# Altium PCB PCB2.PcbDoc
Units mm, origin at the board's own origin, x right, y up, seen from the top; angles counter-clockwise.
Board outline 64.26 x 51.94 mm, 2 copper layers (Top Layer, Bottom Layer); 39 components, 26 nets, 146 pads, 53 vias.
Unrouted connection lines stored in the file: 56.
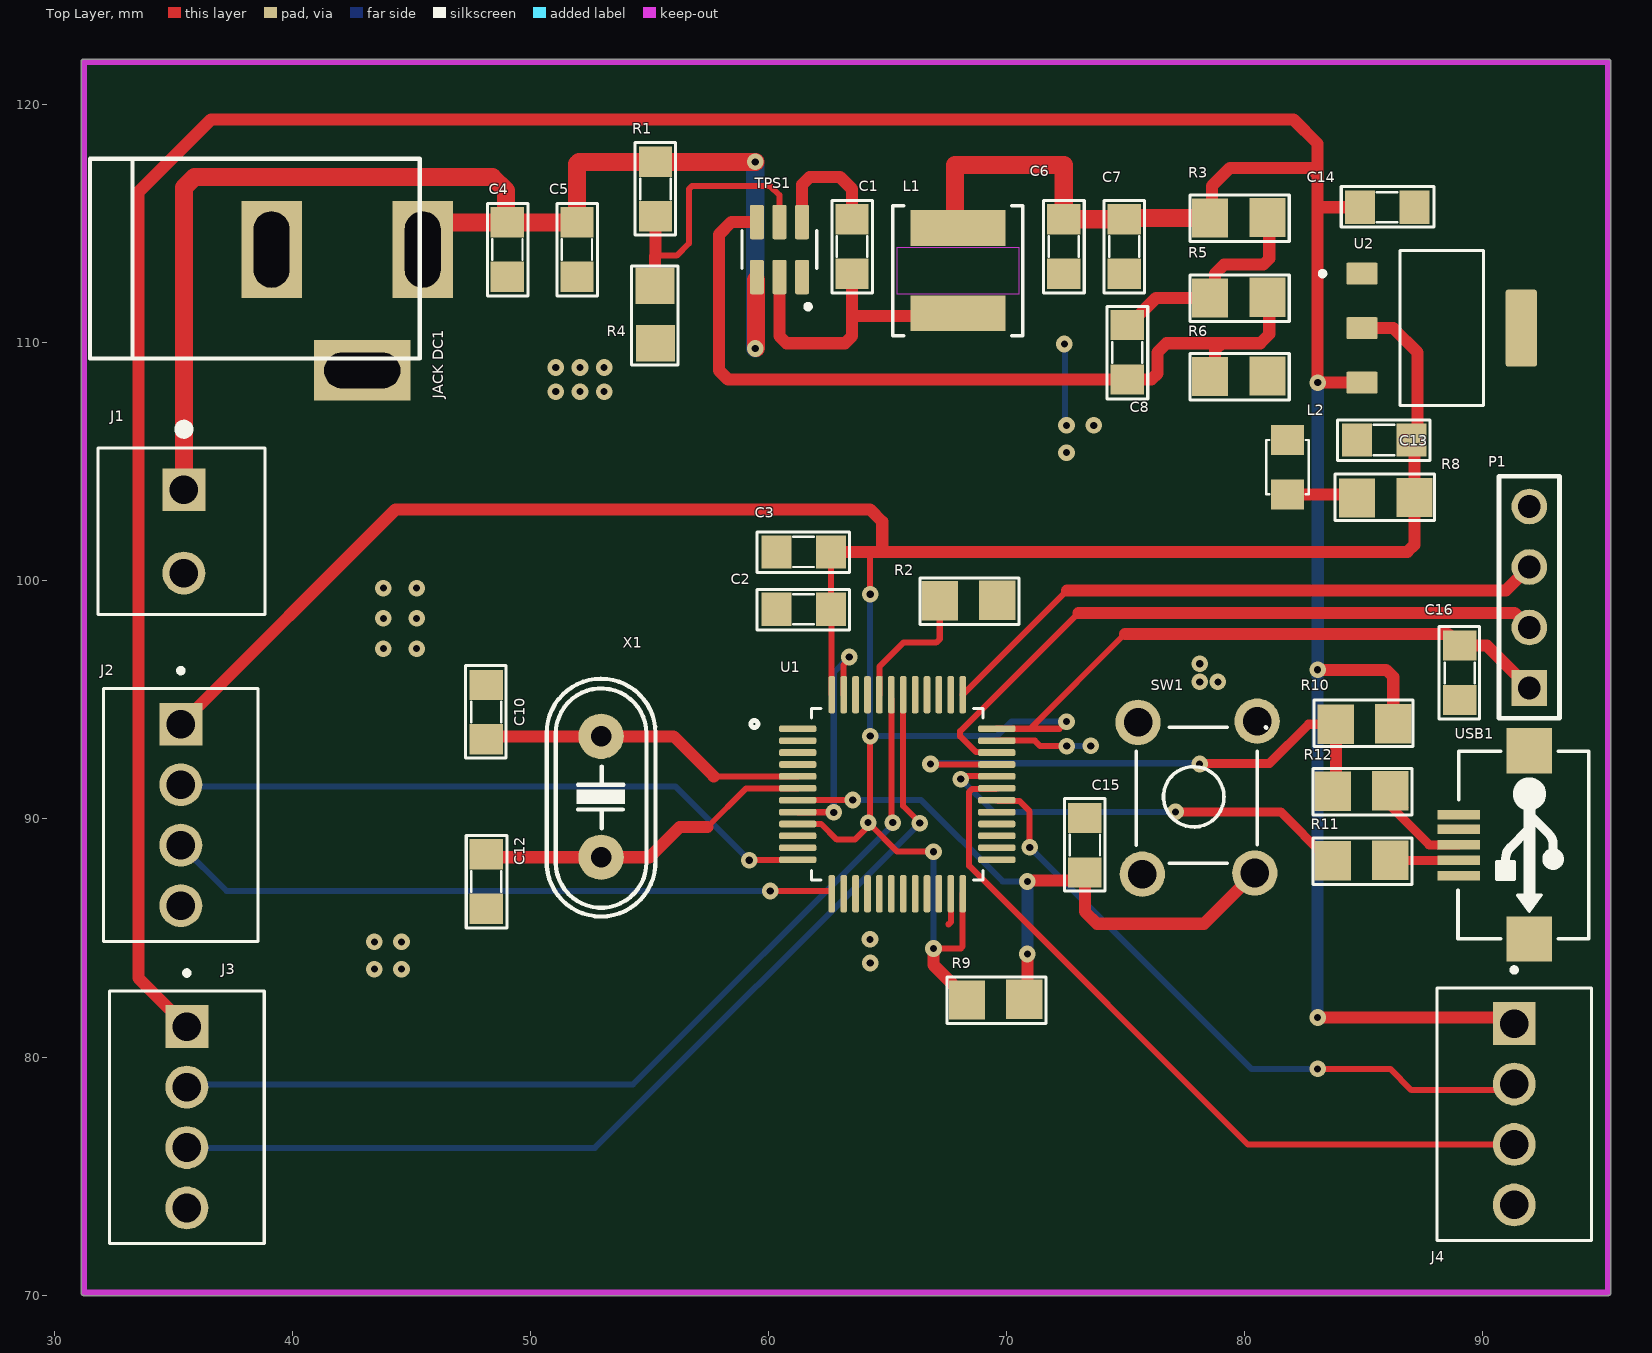
[diagram p0: Top Layer view]
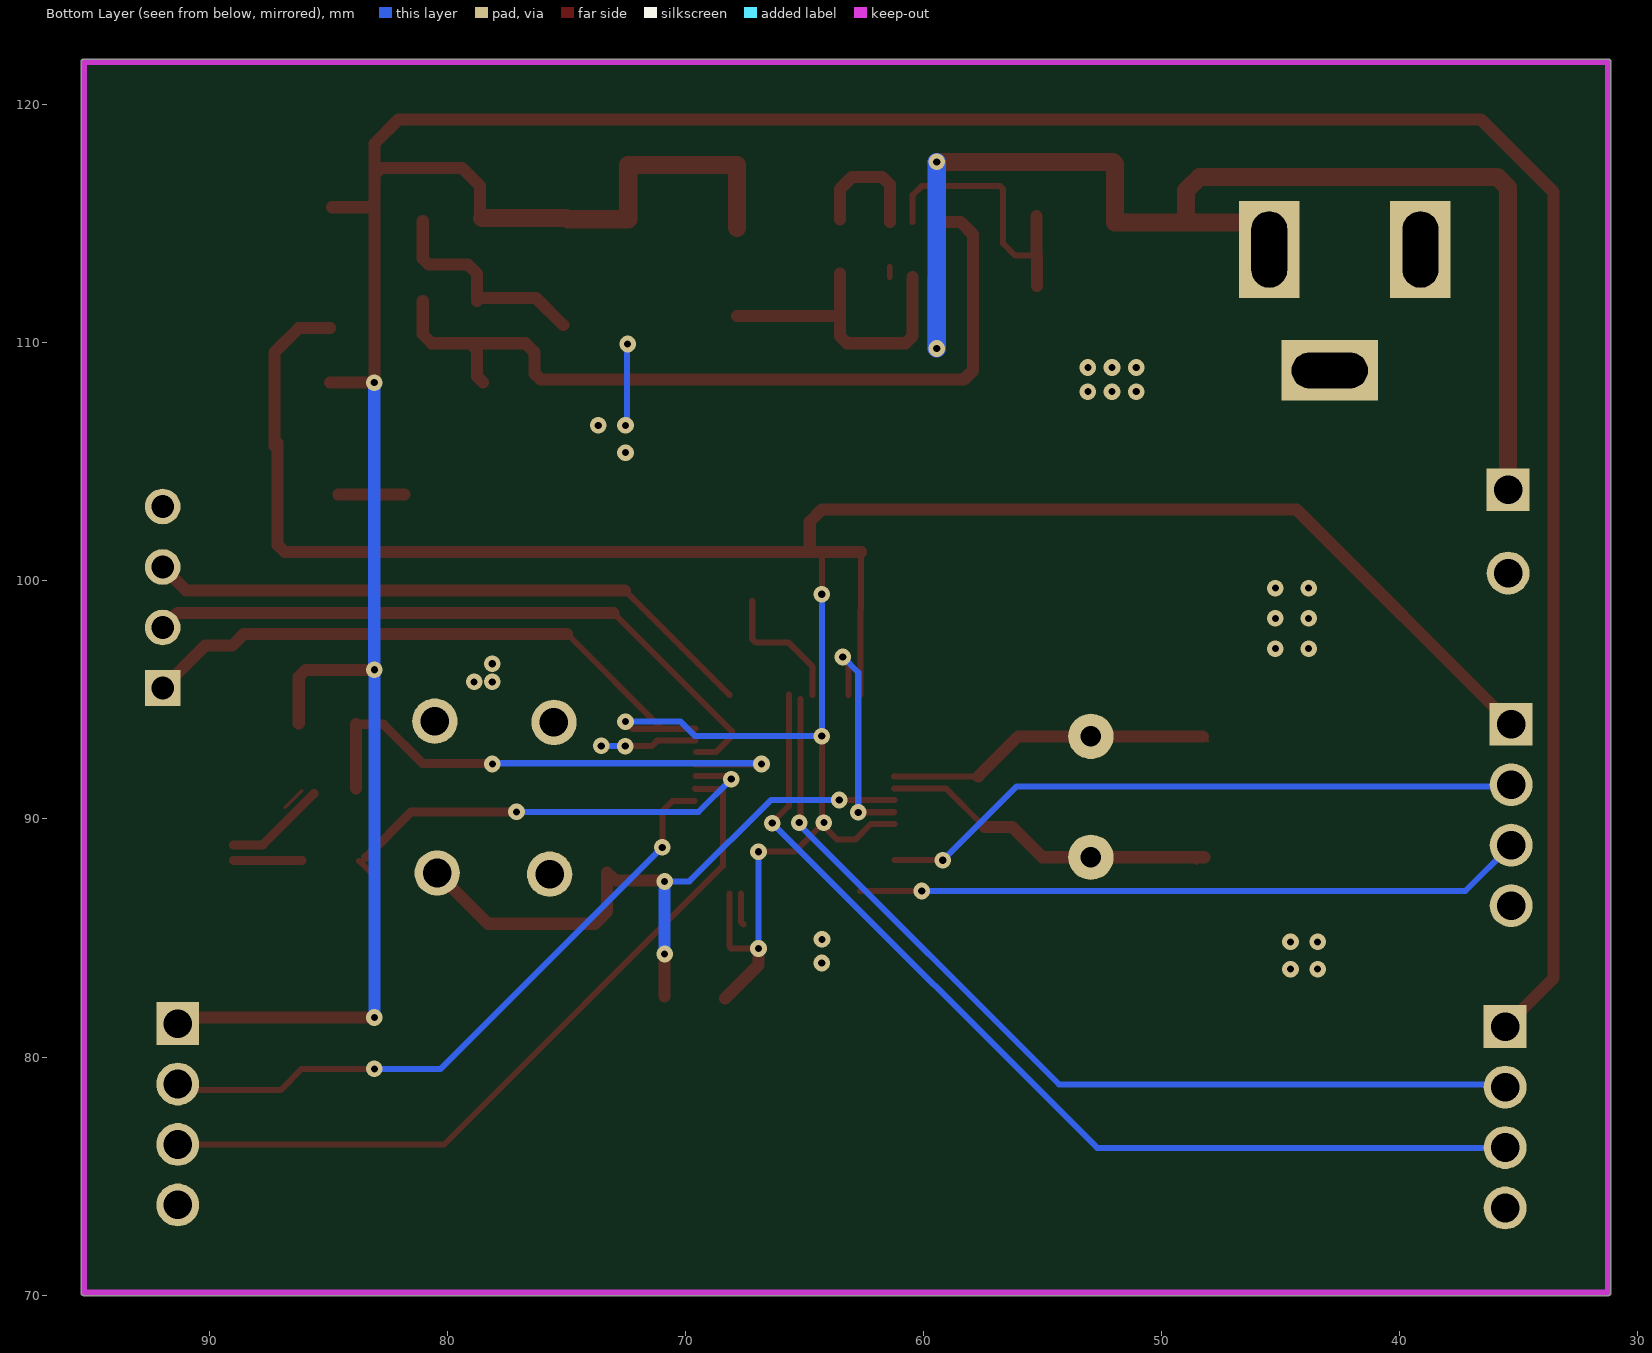
[diagram p1: Bottom Layer view, seen from below]
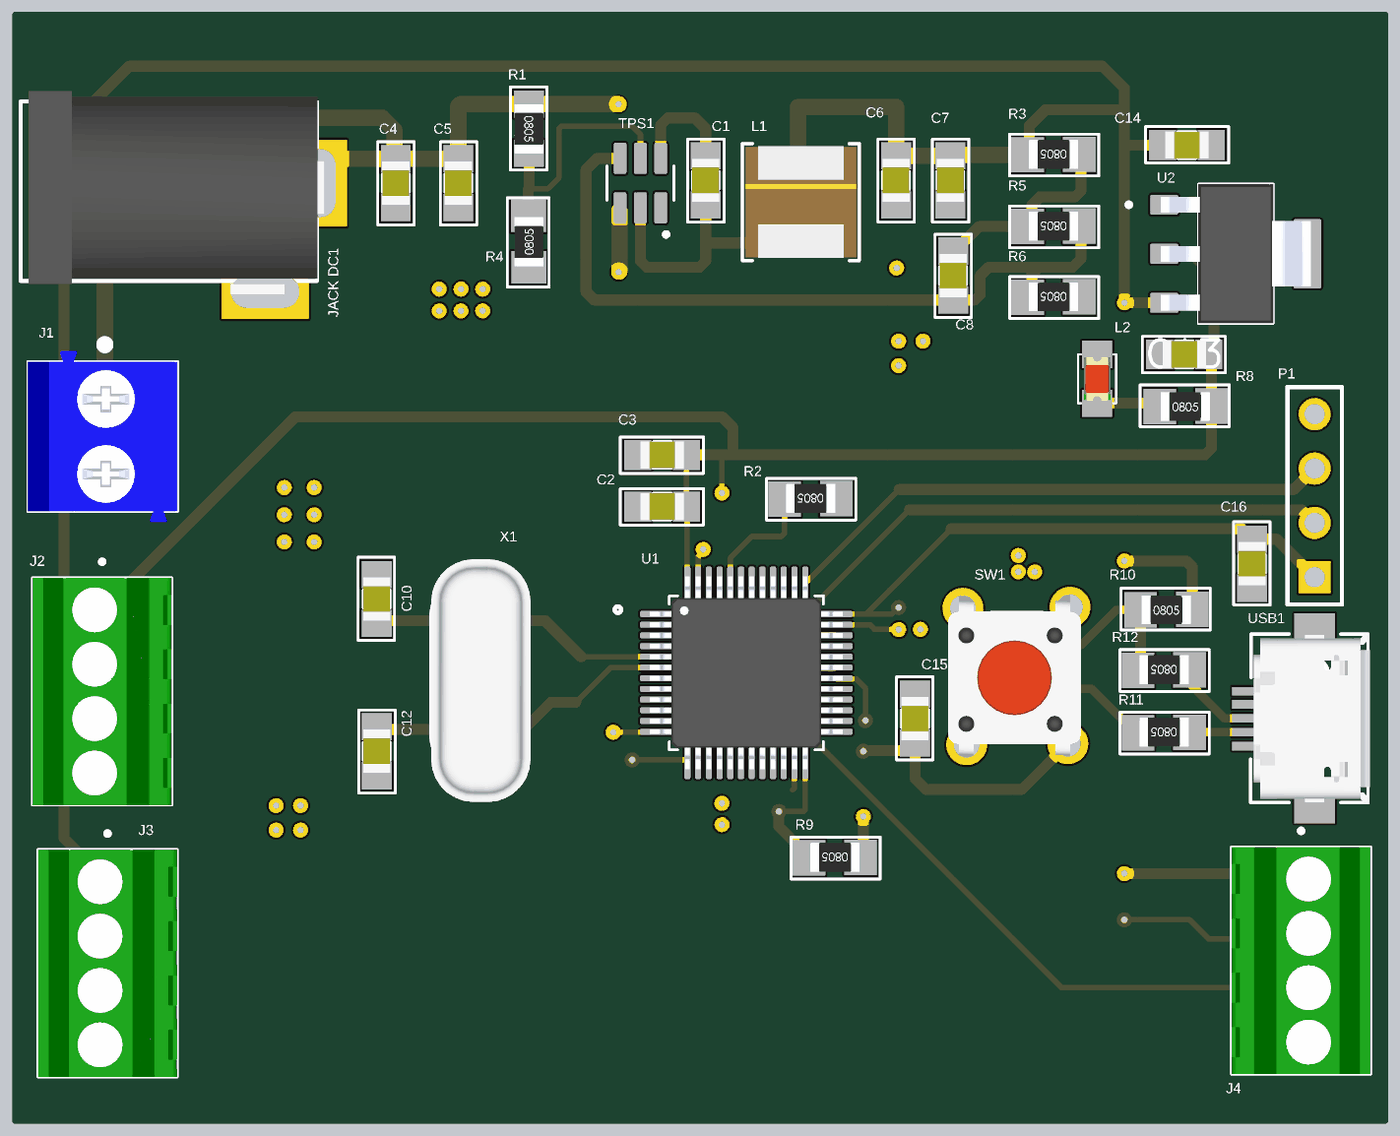
[diagram p2: 3D render of the assembled board from above, using the file's embedded part models]

## Layer stack, top to bottom
Top Solder: solder mask 0.0102, Solder Resist, Dk 3.5
Top Layer: signal copper 0.0356
Dielectric 1: dielectric 0.32, FR-4, Dk 4.8
Bottom Layer: signal copper 0.0356
Bottom Solder: solder mask 0.0102, Solder Resist, Dk 3.5

## Board outline
31.115,70.104 31.115,121.793 cw(c31.242,121.793) 31.242,121.92 95.25,121.92 cw(c95.25,121.793) 95.377,121.793 95.377,70.104 cw(c95.25,70.104) 95.25,69.977 31.242,69.977 cw(c31.242,70.104)

## Design rules (kind name [scope] priority, off if disabled: settings)
Clearance [All] p1: gap=0.254 ignorepadtopadclearanceinfootprint=FALSE
PolygonConnect [All] p1: connectstyle=Relief reliefconductorwidth=0.254 reliefentries=4 polygonreliefangle="90 Angle" airgapwidth=0.254
RoomDefinition Sheet2 [InComponentClass('Sheet2')] p1: confinementstyle=ConfineIn formatcopy=TRUE lockcomponents=FALSE outline 178.435,21.082 475.996,21.082 475.996,62.23 178.435,62.23
RoutingVias [All] p1: holewidth=0.254 width=0.635 viastyle="Through Hole" minholewidth=0.254 minwidth=0.635 maxholewidth=0.254 maxwidth=0.635
SMDNeckDown [All] p1: percent=40.000
SolderMaskExpansion [All] p1: expansion=0.102 istentingtop=FALSE
Width [All] p1: maxlimit=0.127 minlimit=0.127 preferedwidth=0.127
30 further rules are at their usual default settings.

## Components (designator, comment, footprint, x,y, rotation, side; value= is the part's Value field where it differs from the comment)
C1 "0.1uF" SM-0805 63.5,114.046 r90 top value=103
C2 "104" SM-0805 61.468,98.806 r0 top value=103
C3 "10pF" SM-0805 61.468,101.219 r0 top value=103
C4 "10uF" SM-0805 49.022,113.919 r90 top value=103
C5 "0.1uF" SM-0805 51.943,113.919 r90 top value=103
C6 "22uF" SM-0805 72.39,114.046 r90 top value=103
C7 "22uF" SM-0805 74.93,114.046 r90 top value=103
C8 "100pF" SM-0805 75.057,109.601 r90 top value=103
C10 "20pF" SM-0805 48.133,94.488 r270 top value=103
C12 "20pF" SM-0805 48.133,87.376 r90 top value=103
C13 "10uF" SM-0805 85.852,105.918 r0 top value=103
C14 "10uF" SM-0805 85.979,115.697 r180 top value=103
C15 "105" SM-0805 73.279,88.9 r270 top value=103
C16 "104" SM-0805 89.027,96.139 r270 top value=103
J1 "1776275-2" TE_1776275-2 35.433,103.83 r270 top
J2 "282834-4" TE_282834-4 35.306,90.17 r270 top
J3 "282834-4" TE_282834-4 35.56,77.47 r270 top
J4 "282834-4" TE_282834-4 91.313,77.597 r270 top
"JACK DC1" "JACK DC 5.5" "JACK DC 5.5" 42.291,111.379 r0 top value="Jac DC"
L1 "SRN5040-3R3M" IND_SRN5040_BRN 67.945,113.03 r270 top
L2 "LED 0805" LED-0805-Red 81.788,103.632 r90 top
P1 "Header 4" HDR1X4 91.948,95.504 r90 top
R1 "510K" SM-0805 55.245,116.459 r270 top value=1K
R2 "1M" "0805 res" 70.942,100.178 r180 top value=1K
R3 "49.9k" "0805 res" 82.296,116.256 r180 top value="R1/4W - 1K"
R4 "105k" "0805 res" 56.236,108.636 r90 top value="R1/4W - 1K"
R5 "100k" "0805 res" 82.296,112.903 r180 top value="R1/4W - 1K"
R6 "20k" "0805 res" 82.296,109.601 r180 top value="R1/4W - 1K"
R8 "330" "0805 res" 83.363,102.489 r0 top value=1K
R9 "10K" "0805 res" 72.085,83.414 r180 top value=1K
R10 "4.7k" "0805 res" 82.474,92.989 r0 top value=1K
R11 "20" "0805 res" 87.452,89.256 r180 top value=1K
R12 "20" "0805 res" 87.452,92.177 r180 top value=1K
SW1 "SW" SW4 75.438,87.757 r90 top value="Button chip 4 pin"
TPS1 "TPS54202DDCR" SOT95P280X110-6N 60.452,113.919 r90 top
U1 "STM32F103C8T6" QFP50P900X900X160-48N 65.398,91.039 r0 top
U2 "AMS1117-3.3" SOT229P700X180-4N 88.265,110.617 r0 top
USB1 "USB Micro 5p SMD" "USB Micro 5p SMD" 88.98,88.913 r270 top
X1 "8Mhz" XT2 52.959,90.932 r90 top value=4Mhz

## Footprints (in the part's own frame and the unit in brackets; to place one, negate y for a bottom-side part, rotate by r counter-clockwise, add the part's x,y. Pads: shape width x height; smd on the part's side, far side on the other; paste and mask are expansions set on the pad)
"0805 res" [mil]
  rect 60x65 smd: 1(53,39) 2(148,40)
  silkscreen extent 17,2 181,79, body extent 55,12 145,66, height 30
HDR1X4 [mm] "Connector; Header; 4 Position"
  rect 1.5x1.5 hole 0.95: 1(0,0)
  round 1.5 hole 0.95: 2(2.54,0) 3(5.08,0) 4(7.62,0)
  silkscreen extent -1.27,-1.27 8.89,1.27
IND_SRN5040_BRN [mil]
  rect 59x157 smd paste+0 mask+0: 1(-70.5,0) 2(70.5,0)
  Top Layer keep-out region: -39,-100.5 -39,100.5 39,100.5 39,-100.5
  silkscreen extent -108,-108 108,108, body extent -103,-103 103,103, height 157
"JACK DC 5.5" [mm] "Jac DC input"
  rect 2.54x4.064 hole 1.5 slot 3.2 at 90 deg: 1(3.175,2.54) 2(-3.175,2.54)
  rect 4.064x2.54 hole 1.5 slot 3.2 at 0 deg: 3(0.635,-2.54)
  silkscreen extent -10.79,-2.03 3.05,6.35, body extent -10.42,-2.67 3.4,6.84, height 11.02
LED-0805-Red [mil]
  rect 50x55 smd: 1(0,0) 2(90,0)
  silkscreen extent 0,-35 90,35, body extent 5,-25 85,25, height 43
QFP50P900X900X160-48N [mm]
  rrect50% 1.56x0.28 smd: 1(-4.18,2.75) 2(-4.18,2.25) 3(-4.18,1.75) 4(-4.18,1.25) 5(-4.18,0.75) 6(-4.18,0.25) 7(-4.18,-0.25) 8(-4.18,-0.75) 9(-4.18,-1.25) 10(-4.18,-1.75) 11(-4.18,-2.25) 12(-4.18,-2.75) 25(4.18,-2.75) 26(4.18,-2.25) 27(4.18,-1.75) 28(4.18,-1.25) 29(4.18,-0.75) 30(4.18,-0.25) 31(4.18,0.25) 32(4.18,0.75) 33(4.18,1.25) 34(4.18,1.75) 35(4.18,2.25) 36(4.18,2.75)
  rrect50% 0.28x1.56 smd: 13(-2.75,-4.18) 14(-2.25,-4.18) 15(-1.75,-4.18) 16(-1.25,-4.18) 17(-0.75,-4.18) 18(-0.25,-4.18) 19(0.25,-4.18) 20(0.75,-4.18) 21(1.25,-4.18) 22(1.75,-4.18) 23(2.25,-4.18) 24(2.75,-4.18) 37(2.75,4.18) 38(2.25,4.18) 39(1.75,4.18) 40(1.25,4.18) 41(0.75,4.18) 42(0.25,4.18) 43(-0.25,4.18) 44(-0.75,4.18) 45(-1.25,4.18) 46(-1.75,4.18) 47(-2.25,4.18) 48(-2.75,4.18)
  silkscreen extent -6.15,-3.6 3.6,3.6, body extent -4.5,-4.5 4.5,4.5, height 1.6
SM-0805 [mil] "Compoment SMD 80x50mil"
  rect 50x55 smd: 1(-45,0) 2(45,0)
  silkscreen extent -77,-34 76,33, body extent -40,-25 40,25, height 24
SOT95P280X110-6N [mm]
  rrect25% 1.45x0.59 smd: 1(-1.155,-0.95) 2(-1.155,0) 3(-1.155,0.95) 4(1.155,0.95) 5(1.155,0) 6(1.155,-0.95)
  silkscreen extent -2.5,-1.56 0.8,1.56
SOT229P700X180-4N [mm]
  rrect15% 1.31x0.93 smd: 1(-3.345,2.29) 2(-3.345,0) 3(-3.345,-2.29)
  rrect15% 1.31x3.24 smd: 4(3.345,0)
  silkscreen extent -5.1,-3.25 1.75,3.25, body extent -3.5,-3.25 3.5,3.25, height 1.8
SW4 [mil] "SW button 4pin, 250 x250 mil"
  round 75 hole 47.24: 1(-3,-10) 2(250,-200) 3(248,-3) 4(-1,-196)
  silkscreen extent 15,-215 240,0, body extent -36,-220 276,24, height 276
TE_282834-4 [mm]
  rect 1.8x1.8 / inner round 1.8 / far side rect 1.8x1.8 hole 1.2: 1(-3.81,0)
  round 1.8 hole 1.2: 2(-1.27,0) 3(1.27,0) 4(3.81,0)
  silkscreen extent -6.16,-3.25 5.31,3.25, body extent -5.31,-3.25 5.31,3.25, height 10
TE_1776275-2 [mm]
  rect 1.8x1.8 / inner round 1.8 / far side rect 1.8x1.8 hole 1.2: 1(0,0)
  round 1.8 hole 1.2: 2(3.5,0)
  silkscreen extent -2.74,-3.6 5.25,3.4, body extent -2.25,-3.6 5.75,3.4, height 8.3
"USB Micro 5p SMD" [mm]
  rect 0.4x1.778 smd: 1(1.3,0) 2(0.65,0) 3(0,0) 4(-0.65,0) 5(-1.27,0)
  rect 1.9x1.9 smd: 5(-3.95,2.968) 5(3.95,2.968)
  silkscreen extent -3.94,-0.03 3.94,5.46, body extent -3.98,0.11 4,5.54, height 2.71
XT2 [mil] "Footpin for Crystal 2 pin"
  round 75 hole 34: 1(-100,0) 2(100,0)
  silkscreen extent -198,-90 195,90, body extent -233,-93 213,90, height 138

## Part data
C1 C2 C3 C4 C5 C6 C7 C8 C10 C12 C13 C14 C15 C16: library part CM, "Cap SMD"
J1: "2 Position Wire to Board Terminal Block Horizontal with Board 0.138\" (3.50mm) Through Hole", Package=None, Availability=Unavailable, Check_prices=https://www.snapeda.com/parts/1776275-2/TE+Connectivity+AMP+Connectors/view-part/?ref=eda, MF="TE Connectivity", MP=1776275-2, Price=None, SnapEDA_Link=https://www.snapeda.com/parts/1776275-2/TE+Connectivity+AMP+Connectors/view-part/?ref=snap
J2 J3 J4: "4 Position Wire to Board Terminal Block Horizontal with Board 0.100 (2.54mm) Through Hole", Package=None, Availability="In Stock", Check_prices=https://www.snapeda.com/parts/282834-4/TE+Connectivity+AMP+Connectors/view-part/?ref=eda, EU_RoHS_Compliance="Compliant with Exemptions", MF="TE Connectivity", MP=282834-4, Price=None, Purchase-URL=https://pricing.snapeda.com/search/part/282834-4/?ref=eda, SnapEDA_Link=https://www.snapeda.com/parts/282834-4/TE+Connectivity+AMP+Connectors/view-part/?ref=snap
L1: "No Description Available", Mfr_Name="Bourns Electronics", Digi-Key_Part_Number_1=SRN5040-3R3MTR-ND, Digi-Key_Part_Number_2=SRN5040-3R3MCT-ND, Digi-Key_Part_Number_3=SRN5040-3R3MDKR-ND
L2: library part "LED 0805 Do", "Dán", Chung_Loai=Dán, Don_Vi=Con, Ma_Hang=MH000897, Ten_Linh_Kien="LED 0805 Màu Đỏ (Red)"
P1: "Header, 4-Pin", LatestRevisionDate=17-Jul-2002, LatestRevisionNote="Re-released for DXP Platform.", Publisher="Altium Limited"
R1 R2 R8 R9 R10 R11 R12: library part RM, "Resistor SMD"
R3 R4 R5 R6: library part res0805, "Resistor 1/4W"
SW1: library part SW4, "Switch button 4 pin"
TPS1: "4.5V to 28V Input, 2A Output, EMI Friendly Synchronous Step-Down Converter 6-SOT-23-THIN -40 to 125", Package="SOT-23-THN-6 Texas Instruments", Availability=Good, BuyPart=https://www.snapeda.com/parts/TPS54202DDCR/Texas%20Instruments/view-part/565860/?ref=eda, DigiKey-Purchase-URL=https://snapeda.com/shop?store=DigiKey&id=565860, MF="Texas Instruments", Mouser-Purchase-URL=https://snapeda.com/shop?store=Mouser&id=565860, MP=TPS54202DDCR, Price=None, SnapEDA_Link=https://www.snapeda.com/parts/TPS54202DDCR/Texas%20Instruments/view-part/565860/?ref=snap, Texas_Instruments-Purchase-URL=https://snapeda.com/shop?store=Texas+Instruments&id=565860
U1: "ARM® Cortex®-M3 STM32F1 Microcontroller IC 32-Bit 72MHz 64KB (64K x 8) FLASH 48-LQFP (7x7)", Package="LQFP-48 STMicroelectronics", Check_prices=https://www.snapeda.com/parts/STM32F103C8T6/STMicroelectronics/view-part/?ref=eda, MF=STMicroelectronics, MP=STM32F103C8T6, SnapEDA_Link=https://www.snapeda.com/parts/STM32F103C8T6/STMicroelectronics/view-part/?ref=snap
U2: "Sot223/Pkg 1-Amp 3.3-Volt Low Drop Out Voltage Regulatator", Package="SOT-223 Seeed Technology", Availability="Not in stock", Check_prices=https://www.snapeda.com/parts/AMS1117-3.3/Advanced+Monolithic+Systems/view-part/?ref=eda, MF="Advanced Monolithic Systems", MP=AMS1117-3.3, Price=None, SnapEDA_Link=https://www.snapeda.com/parts/AMS1117-3.3/Advanced+Monolithic+Systems/view-part/?ref=snap
USB1: "USB Type B", Ma_Hang=MH001020, Ten="MicroUSB MK5P SMD"
X1: library part XT2, "Crystal For all Crystal 2pin."

## Via types
v1: diameter 0.7, hole 0.3, Top Layer to Bottom Layer, 38 vias
v2: diameter 0.7, hole 0.3, Top Layer to Bottom Layer, tented both sides, 15 vias

## Nets (pads, with @x,y where several pads share a name; then routed paths per layer and width w, separated by ;. In a path a pad name is that pad's centre, name@x,y a point inside that pad or via, vN(x,y) a via of type N, cw(c..) or ccw(c..) an arc to the next point about the centre after c; other vN are vias at no path point)
3.3V: C2.2 C3.2 C13.2 C16.1 J2.1 P1.1 R8.2 R9.2 U1.9 U1.24 U1.36 U1.48 U2.2 | length 140
  Top Layer w0.127: R9.2 R9.2@68.326,82.461 ; C13.2 C13.2@87.122,105.791
  Top Layer w0.254: U1.9 62.203,89.789 62.858,89.134 63.62,89.134 v2@64.235,89.749 ; C2.2 C3.2 ; C2.2@62.635,98.806 62.635,95.232 U1.48 ; v2@64.235,89.789 65.398,88.626 v2(66.922,88.626) ; v2@64.248,89.848 v2(64.176,89.848) 64.262,89.933 64.262,90.22 v2(64.262,93.48) ; v1(64.262,99.441) 64.262,101.219 ; v2(66.922,84.562) 68.065,84.562 68.149,84.645 U1.24 ; U1.36 70.98,93.789 ; v2(72.51,94.087) 72.213,93.789 70.98,93.789 ; 74.961,97.77 70.98,93.789
  Top Layer w0.508: J2.1 44.323,102.997 64.262,102.997 64.77,102.489 64.77,101.219 ; C3.2 64.262,101.219 64.77,101.219 ; v2(66.922,84.562) 66.922,83.865 R9.2@68.326,82.461 ; 74.961,97.77 88.539,97.77 C16.1 90.17,97.282 P1.1 ; U2.2 86.233,110.617 87.249,109.601 87.249,105.918 C13.2@87.249,105.664 ; C13.2@87.122,105.791 R8.2 87.122,101.517 86.824,101.219 64.77,101.219
  Bottom Layer w0.254: v1(64.262,99.441) v2(64.262,93.48) 69.582,93.48 70.189,94.087 v2(72.51,94.087) ; v2(66.922,84.562) v2(66.922,88.626)
5V: C6.2 C7.2 C14.2 J3.1 J4.1 L1.1 R3.2 R10.2 U2.3 | length 163
  Top Layer w0.127: v1@83.058,108.331 v1(83.062,108.327) ; J4.1@91.059,81.661 J4.1
  Top Layer w0.508: J3.1 33.528,83.312 33.528,116.332 36.576,119.38 82.042,119.38 83.058,118.364 83.058,117.05 ; R3.2 78.613,115.316 78.613,116.586 79.375,117.348 82.76,117.348 83.058,117.05 ; v1(83.058,81.661) J4.1@91.059,81.661 ; v1(83.058,96.266) 85.935,96.266 86.233,95.968 R10.2 ; v1@83.058,108.331 83.058,115.697 ; v1(83.062,108.327) U2.3 ; C14.2 83.058,115.697 ; 83.058,115.697 83.058,117.05
  Top Layer w0.762: L1.1@67.818,114.821 67.818,117.475 72.39,117.475 C6.2 C7.2 74.981,115.24 R3.2
  Bottom Layer w0.508: v1(83.058,81.661) v1(83.058,96.266) ; v1@83.062,96.266 v1(83.062,108.327)
BOOT: C1.2 TPS1.6 | length 5.3
  Top Layer w0.508: TPS1.6 61.402,116.647 61.722,116.967 62.992,116.967 63.5,116.459 C1.2
EN: R1.2 R4.2 TPS1.5 | length 12
  Top Layer w0.127: 55.22,113.64 55.245,113.665
  Top Layer w0.254: 55.245,113.665 56.134,113.665 56.642,114.173 56.642,116.459 56.769,116.586 60.071,116.586 60.452,116.205 TPS1.5
  Top Layer w0.508: R4.2 55.22,113.64 ; 55.245,113.665 R1.2
FB: C8.1 R5.1 R6.2 TPS1.4 | length 35.4
  Top Layer w0.508: TPS1.4 58.432,115.074 57.912,114.554 57.912,108.839 58.293,108.458 C8.1 76.073,108.458 76.327,108.712 76.327,109.601 76.708,109.982 79.038,109.982 ; R6.2@78.486,108.331 78.74,108.585 78.74,109.684 79.038,109.982 ; R5.1@81.026,111.76 81.026,110.363 80.645,109.982 79.038,109.982
GND: "JACK DC1.2" "JACK DC1.3" C2.1 C3.1 C4.1 C5.1 C6.1 C7.1 C10.1 C12.1 C13.1 C14.1 C15.1 C16.2 J1.2 J2.4 J3.4 J4.4 L2.2 P1.4 R2.1 R4.1 R6.1 SW1.3 TPS1.1 U1.8 U1.23 U1.35 U1.47 U2.1 USB1.4 USB1.5 | length 19.4
  Top Layer w0.127: U1.8 U1.8@61.225,90.283 ; v1@62.726,90.283 v1(62.731,90.277) ; v1@63.384,96.705 v1(63.384,96.806)
  Top Layer w0.236: TPS1.1 TPS1.1@61.402,113.194
  Top Layer w0.254: U1.8@61.225,90.283 v1@62.726,90.283 ; U1.47 63.149,96.469 v1@63.384,96.705 ; 67.557,85.578 67.648,85.669 U1.23 ; U1.35 71.173,93.289 71.391,93.071 72.504,93.071 v1(72.516,93.059)
  Bottom Layer w0.127: v1(72.42,109.952) v1@72.45,109.922 ; v1@72.45,106.593 v1(72.51,106.533) ; SW1.3@75.514,93.905 SW1.3
  Bottom Layer w0.254: v1(62.731,90.277) 62.731,96.153 v1(63.384,96.806) ; v1@72.45,106.593 v1@72.45,109.922 ; v1(72.516,93.059) 72.522,93.065 73.521,93.065 v1(73.526,93.071)
  other v1: 43.434,83.693 44.577,83.693 64.262,83.947 43.434,84.836 44.577,84.836 64.255,84.943 78.105,95.758 78.867,95.758 78.105,96.52 43.815,97.155 45.212,97.155 43.815,98.425 45.212,98.425 43.815,99.695 45.212,99.695 72.51,105.39 73.653,106.533 51.054,107.95 52.07,107.95 53.086,107.95 51.054,108.966 52.07,108.966 53.086,108.966
NetC8_2: C8.2 R3.1 R5.2 | length 9.2
  Top Layer w0.127: C8.2 C8.2@75.12,110.744
  Top Layer w0.508: C8.2@75.12,110.744 76.263,111.887 R5.2 ; R5.2@78.74,111.76 78.74,112.903 79.121,113.284 80.772,113.284 81.026,113.538 R3.1@81.026,115.113
NetL2_1: L2.1 R8.1 | length 3
  Top Layer w0.127: R8.1@84.557,103.632 R8.1
  Top Layer w0.508: L2.1 R8.1@84.557,103.632
NetR2_2: R2.2 U1.44 | length 5.8
  Top Layer w0.254: U1.44 64.648,96.398 65.659,97.409 67.034,97.409 67.183,97.558 R2.2
NetR11_1: R11.1 USB1.2 | length 3
  Top Layer w0.127: R11.1@86.108,88.263 R11.1 R11.1@86.206,88.365
  Top Layer w0.381: R11.1@86.108,88.263 USB1.2
NetR12_1: R12.1 USB1.3 | length 5.3
  Top Layer w0.127: R12.1 R12.1@86.804,90.487
  Top Layer w0.381: R12.1@85.598,91.059 87.744,88.913 USB1.3
OSC_IN: C10.2 U1.5 X1.2 | length 13.9
  Top Layer w0.127: C10.2@48.056,93.268 C10.2 C10.2@48.26,93.472
  Top Layer w0.254: 57.69,91.789 U1.5
  Top Layer w0.508: C10.2@48.26,93.472 X1.2 56.007,93.472 57.69,91.789
OSC_OUT: C12.2 U1.6 X1.1 | length 14.8
  Top Layer w0.127: C12.2 48.323,88.328 C12.2@48.514,88.138
  Top Layer w0.254: 57.429,89.662 59.056,91.289 U1.6
  Top Layer w0.508: C12.2@48.197,88.392 48.387,88.392 48.514,88.392 X1.1 54.991,88.392 56.261,89.662 57.429,89.662
RESET: C15.2 R9.1 SW1.4 U1.7 | length 28.5
  Top Layer w0.127: R9.1 R9.1@70.866,82.55 ; C15.2@73.132,87.61 C15.2
  Top Layer w0.254: U1.7 63.523,90.789 v2(63.531,90.798)
  Top Layer w0.508: R9.1@70.866,82.55 v1(70.866,84.328) ; v2(70.866,87.376) 70.903,87.413 72.935,87.413 C15.2@73.132,87.61 ; C15.2 73.279,86.106 73.787,85.598 78.283,85.598 SW1.4
  Bottom Layer w0.254: v2(63.531,90.798) 63.538,90.805 66.395,90.805 69.824,87.376 v2(70.866,87.376)
  Bottom Layer w0.508: v1(70.866,84.328) v2(70.866,87.376)
RX1: J4.3 U1.31 | length 32.3
  Top Layer w0.254: U1.31 69.557,91.268 68.549,91.268 68.417,91.137 68.417,88.032 80.123,76.327 J4.3@91.514,76.327
RX2: J2.3 U1.13 | length 28.2
  Top Layer w0.127: J2.3 J2.3@35.369,88.837
  Top Layer w0.254: v2(60.064,86.975) U1.13@62.648,86.975
  Bottom Layer w0.254: J2.3 37.231,86.975 v2(60.064,86.975)
SCL_1: J3.3 U1.42 | length 42.1
  Top Layer w0.254: U1.42 65.648,90.544 66.342,89.85 v2(66.342,89.824)
  Top Layer w0.508: J3.3 J3.3@35.569,76.191
  Bottom Layer w0.254: J3.3@35.569,76.182 52.7,76.182 v2(66.342,89.824)
SDA_1: J3.2 U1.43 | length 39.5
  Top Layer w0.254: U1.43@65.149,95.041 65.149,89.91 v2(65.21,89.848)
  Bottom Layer w0.254: J3.2@35.56,78.847 54.294,78.847 65.21,89.763 v2(65.21,89.848)
SW: C1.1 L1.2 TPS1.2 | length 12.9
  Top Layer w0.127: L1.2@67.831,111.125 L1.2
  Top Layer w0.508: TPS1.2 60.452,110.28 60.75,109.982 63.202,109.982 63.5,110.28 63.5,111.125 ; C1.1 63.5,111.125 ; L1.2@67.831,111.125 63.5,111.125
SWCLK: P1.3 U1.37 | length 26
  Top Layer w0.254: U1.37 72.534,99.604
  Top Layer w0.508: 72.534,99.604 90.968,99.604 P1.3
SWDIO: P1.2 U1.34 | length 28.2
  Top Layer w0.152: U1.34@69.549,92.819 U1.34
  Top Layer w0.254: U1.34@69.549,92.819 68.699,92.819 68.044,93.474 68.044,93.684 73.018,98.659
  Top Layer w0.508: 73.018,98.659 91.333,98.659 P1.2
TX1: J4.2 U1.30 | length 28.2
  Top Layer w0.127: J4.2@90.86,78.867 91.186,78.867 J4.2
  Top Layer w0.254: U1.30@69.608,90.759 70.526,90.759 70.962,90.323 v2(70.962,88.809) ; v2(83.058,79.502) 86.106,79.502 86.995,78.613 91.059,78.613 J4.2
  Bottom Layer w0.254: v2(70.962,88.809) 80.269,79.502 v2(83.058,79.502)
TX2: J2.2 U1.12 | length 27.3
  Top Layer w0.127: J2.2 J2.2@35.376,91.37 ; v1(59.182,88.265) v1@59.194,88.277 ; U1.12@61.207,88.277 U1.12
  Top Layer w0.254: v1@59.194,88.277 U1.12@61.207,88.277
  Bottom Layer w0.254: J2.2@35.306,91.37 56.077,91.37 v1(59.182,88.265)
USBDM: R11.2 U1.32 | length 19
  Top Layer w0.152: v2@68.1,91.674 v2@68.127,91.674 ; U1.32@69.549,91.759 U1.32
  Top Layer w0.254: v2(68.065,91.674) v2@68.1,91.674 ; v2@68.127,91.674 68.254,91.801 U1.32@69.564,91.801 ; R11.2@83.185,87.732 R11.2
  Top Layer w0.381: v2(77.089,90.297) 81.509,90.297 R11.2@83.426,88.379
  Bottom Layer w0.254: v2(68.065,91.674) 69.443,90.297 v2(77.089,90.297)
USBDP: R10.1 R12.2 U1.33 | length 23.4
  Top Layer w0.127: v2(78.098,92.309) v2@78.118,92.329 ; R12.2 R12.2@83.82,91.288
  Top Layer w0.254: v1@66.812,92.289 U1.33
  Top Layer w0.381: v2@78.118,92.329 81.026,92.329 82.677,93.98 R10.1
  Top Layer w0.508: R12.2@83.82,91.288 R10.1
  Bottom Layer w0.127: v1(66.795,92.309) v1@66.828,92.342
  Bottom Layer w0.254: v1@66.828,92.342 v2@78.098,92.342
VIN: "JACK DC1.1" C4.2 C5.2 J1.1 R1.1 TPS1.3 | length 55.8
  Top Layer w0.127: 45.466,113.919 46.598,115.051 ; C4.2@49.011,115.051 C4.2 ; 51.943,117.511 52.034,117.602 ; TPS1.3 TPS1.3@59.563,112.703
  Top Layer w0.508: v1(59.436,109.759) v1@59.469,109.792 ; TPS1.3@59.469,112.629 TPS1.3@59.543,112.703
  Top Layer w0.762: J1.1 35.433,116.521 35.879,116.967 48.387,116.967 48.96,116.394 48.96,115.124 C4.2 C5.2 51.943,117.511 ; 46.598,115.051 C4.2@49.011,115.051 ; 52.034,117.602 R1.1 v1(59.436,117.602) ; v1@59.469,109.792 TPS1.3@59.469,112.629
  Bottom Layer w0.762: v1(59.436,109.759) v1(59.436,117.602)
pads on no net: SW1.1 SW1.2 U1.1 U1.2 U1.3 U1.4 U1.10 U1.11 U1.14 U1.15 U1.16 U1.17 U1.18 U1.19 U1.20 U1.21 U1.22 U1.25 U1.26 U1.27 U1.28 U1.29 U1.38 U1.39 U1.40 U1.41 U1.45 U1.46 U2.4 USB1.1
copper on no net: | length 0.1
  Top Layer w0.127: 61.176,91.747 61.219,91.789
  Top Layer w0.152: 69.549,92.318 69.578,92.289
  Bottom Layer w0.254: 78.079,92.328 78.098,92.309

## Keep-outs
Keep-Out Layer:
  lines w0.254: 31.242,70.104 95.25,70.104 95.25,121.793 31.242,121.793 31.242,70.104